# EAGLE board alu3 2 (EAGLE 7.6.0)
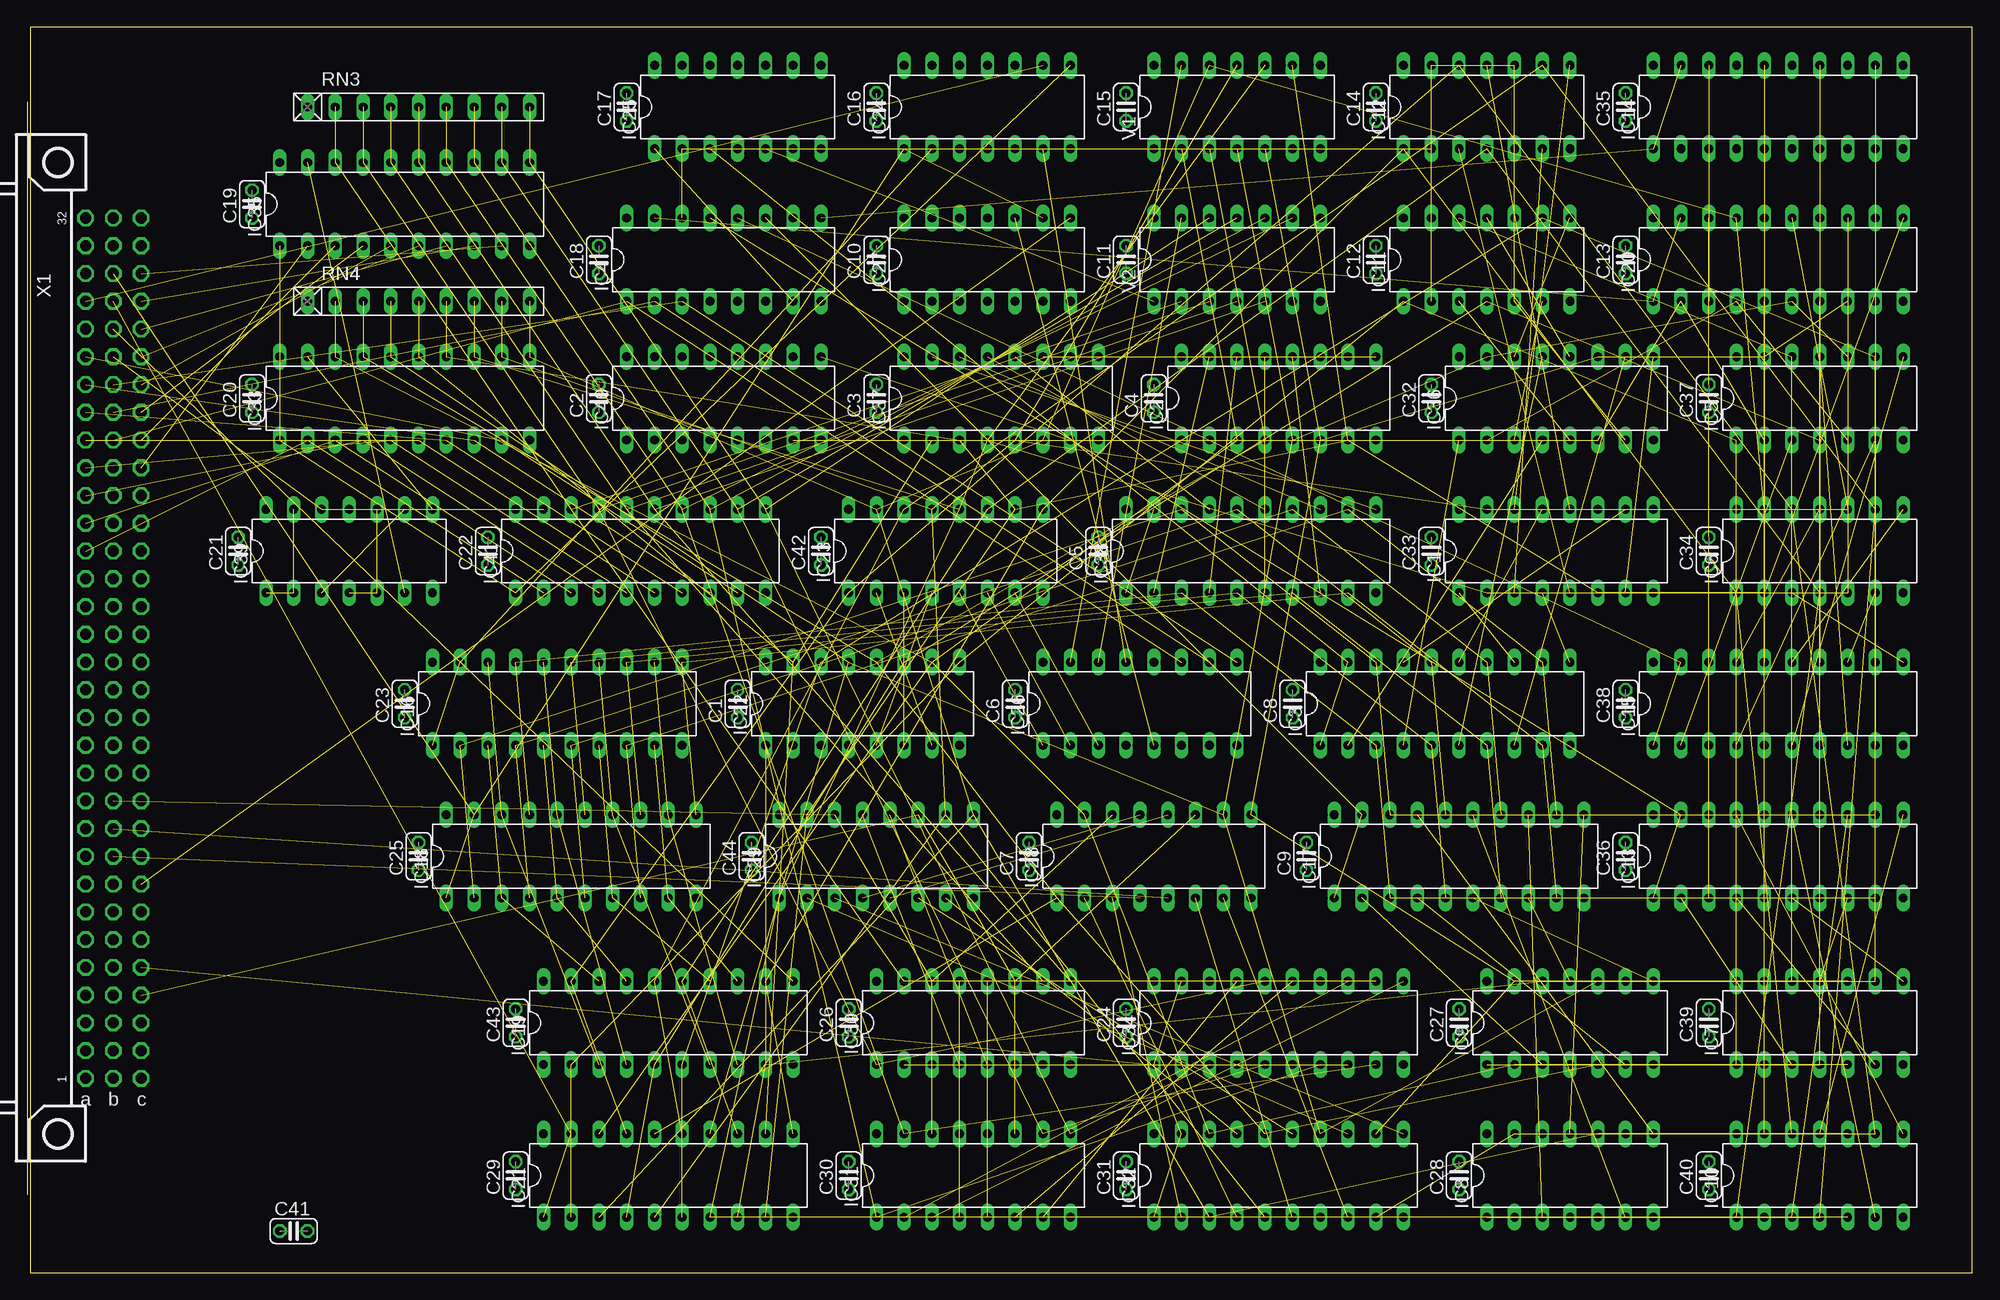
[diagram p0: board, top side]
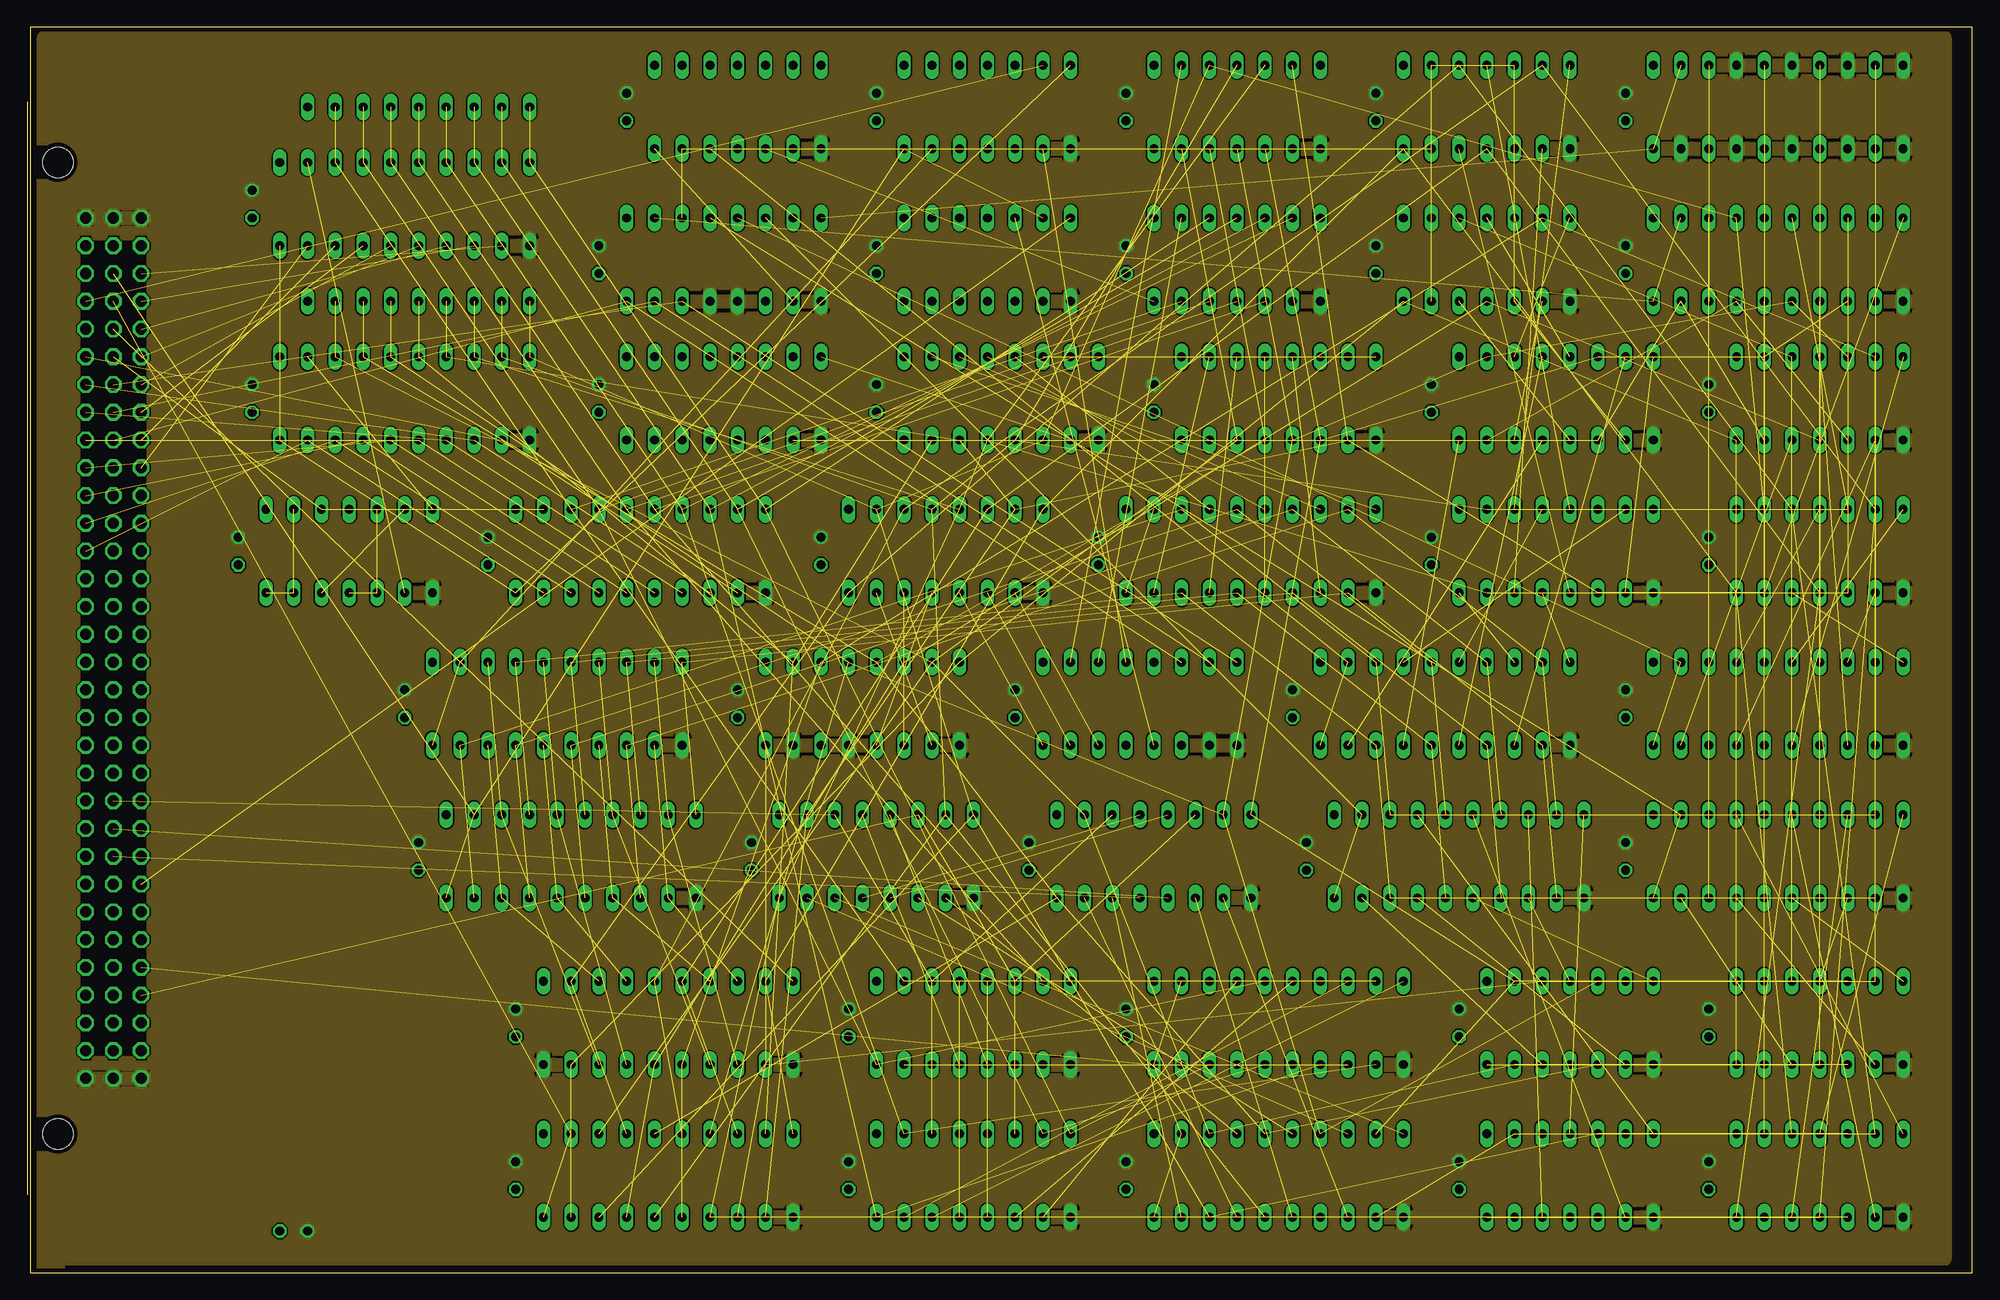
[diagram p1: board, inner layer Route2]
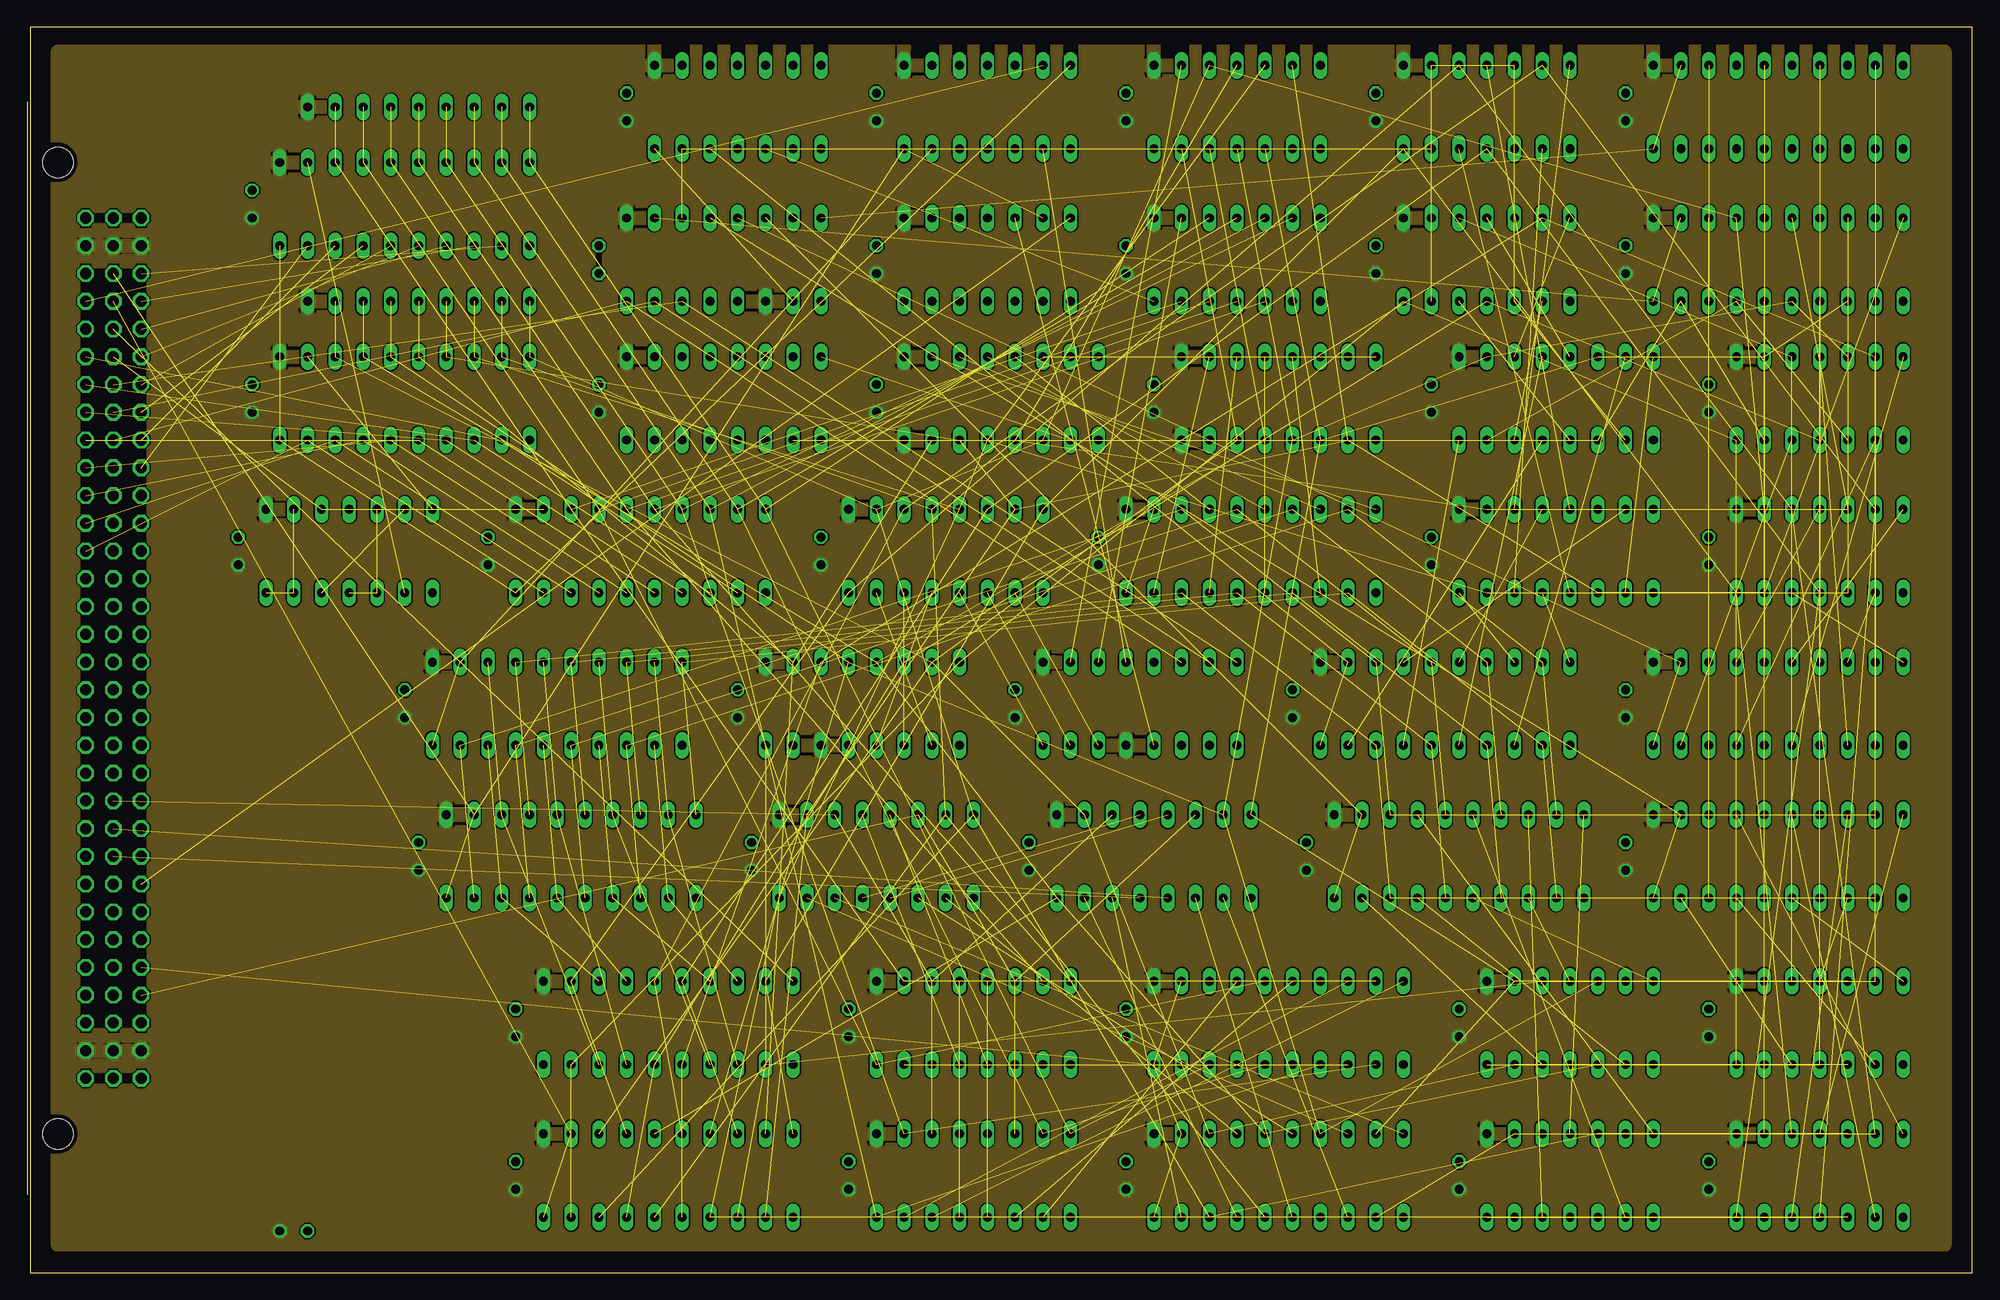
[diagram p2: board, inner layer Route15]

Size 177.78 x 113.97 mm. Coordinates in mm from the lower left corner, seen from the top.
Outline: 0,0 177.78,0 177.78,113.97 0,113.97 0,0
Copper layers (1*2*15*16): Top 0.035559375mm / dielectric 0.17018125mm / Route2 0.01778125mm / dielectric 47mil / Route15 0.01778125mm / dielectric 0.17018125mm / Bottom 0.035559375mm
Design rules "OSHPark-4layer": minimum track width 5mil, minimum drill 10mil, track to track 5mil, track to pad 5mil, pad to pad 5mil, via to via 5mil, smd to smd 5mil, copper to edge 15mil, drill to drill 6mil, minimum pad ring 4mil, minimum via ring 4mil, stop-mask expansion 2.5mil, vias tented up to drill 0mil, thermal gap 10mil

## Footprints (pad centres in the part's own frame; a part is rotated, then mirrored left to right if it is on the bottom)
C025-024X044 = drill 0.813 octagon: 1 -1.27,0; 2 1.27,0
DIL16 = drill 0.813 long: 1 -8.89,-3.81; 2 -6.35,-3.81; 3 -3.81,-3.81; 4 -1.27,-3.81; 5 1.27,-3.81; 6 3.81,-3.81; 7 6.35,-3.81; 8 8.89,-3.81; 9 8.89,3.81; 10 6.35,3.81; 11 3.81,3.81; 12 1.27,3.81; 13 -1.27,3.81; 14 -3.81,3.81; 15 -6.35,3.81; 16 -8.89,3.81
DIL20 = drill 0.813 long: 1 -11.43,-3.81; 2 -8.89,-3.81; 3 -6.35,-3.81; 4 -3.81,-3.81; 5 -1.27,-3.81; 6 1.27,-3.81; 7 3.81,-3.81; 8 6.35,-3.81; 9 8.89,-3.81; 10 11.43,-3.81; 11 11.43,3.81; 12 8.89,3.81; 13 6.35,3.81; 14 3.81,3.81; 15 1.27,3.81; 16 -1.27,3.81; 17 -3.81,3.81; 18 -6.35,3.81; 19 -8.89,3.81; 20 -11.43,3.81
DIL14 = drill 0.813 long: 1 -7.62,-3.81; 2 -5.08,-3.81; 3 -2.54,-3.81; 4 0,-3.81; 5 2.54,-3.81; 6 5.08,-3.81; 7 7.62,-3.81; 8 7.62,3.81; 9 5.08,3.81; 10 2.54,3.81; 11 0,3.81; 12 -2.54,3.81; 13 -5.08,3.81; 14 -7.62,3.81
RN-9 = drill 0.813 long: 1 -10.16,0; 2 -7.62,0; 3 -5.08,0; 4 -2.54,0; 5 0,0; 6 2.54,0; 7 5.08,0; 8 7.62,0; 9 10.16,0
FABC96R = drill 1.016 octagon: A1 -2.54,39.37; A2 -2.54,36.83; A3 -2.54,34.29; A4 -2.54,31.75; A5 -2.54,29.21; A6 -2.54,26.67; A7 -2.54,24.13; A8 -2.54,21.59; A9 -2.54,19.05; A10 -2.54,16.51; A11 -2.54,13.97; A12 -2.54,11.43; A13 -2.54,8.89; A14 -2.54,6.35; A15 -2.54,3.81; A16 -2.54,1.27; A17 -2.54,-1.27; A18 -2.54,-3.81; A19 -2.54,-6.35; A20 -2.54,-8.89; A21 -2.54,-11.43; A22 -2.54,-13.97; A23 -2.54,-16.51; A24 -2.54,-19.05; A25 -2.54,-21.59; A26 -2.54,-24.13; A27 -2.54,-26.67; A28 -2.54,-29.21; A29 -2.54,-31.75; A30 -2.54,-34.29; A31 -2.54,-36.83; A32 -2.54,-39.37; B1 -5.08,39.37; B2 -5.08,36.83; B3 -5.08,34.29; B4 -5.08,31.75; B5 -5.08,29.21; B6 -5.08,26.67; B7 -5.08,24.13; B8 -5.08,21.59; B9 -5.08,19.05; B10 -5.08,16.51; B11 -5.08,13.97; B12 -5.08,11.43; B13 -5.08,8.89; B14 -5.08,6.35; B15 -5.08,3.81; B16 -5.08,1.27; B17 -5.08,-1.27; B18 -5.08,-3.81; B19 -5.08,-6.35; B20 -5.08,-8.89; B21 -5.08,-11.43; B22 -5.08,-13.97; B23 -5.08,-16.51; B24 -5.08,-19.05; B25 -5.08,-21.59; B26 -5.08,-24.13; B27 -5.08,-26.67; B28 -5.08,-29.21; B29 -5.08,-31.75; B30 -5.08,-34.29; B31 -5.08,-36.83; B32 -5.08,-39.37; C1 -7.62,39.37; C2 -7.62,36.83; C3 -7.62,34.29; C4 -7.62,31.75; C5 -7.62,29.21; C6 -7.62,26.67; C7 -7.62,24.13; C8 -7.62,21.59; C9 -7.62,19.05; C10 -7.62,16.51; C11 -7.62,13.97; C12 -7.62,11.43; C13 -7.62,8.89; C14 -7.62,6.35; C15 -7.62,3.81; C16 -7.62,1.27; C17 -7.62,-1.27; C18 -7.62,-3.81; C19 -7.62,-6.35; C20 -7.62,-8.89; C21 -7.62,-11.43; C22 -7.62,-13.97; C23 -7.62,-16.51; C24 -7.62,-19.05; C25 -7.62,-21.59; C26 -7.62,-24.13; C27 -7.62,-26.67; C28 -7.62,-29.21; C29 -7.62,-31.75; C30 -7.62,-34.29; C31 -7.62,-36.83; C32 -7.62,-39.37 | hole 2.794: 0,-44.456; 0,44.456

## Placement (x,y rotation side)
C1  [C025-024X044]  64.77,52.07 90 top
C2  [C025-024X044]  52.07,80.01 90 top
C3  [C025-024X044]  77.47,80.01 90 top
C4  [C025-024X044]  102.87,80.01 90 top
C5  [C025-024X044]  97.79,66.04 90 top
C6  [C025-024X044]  90.17,52.07 90 top
C7  [C025-024X044]  91.44,38.1 90 top
C8  [C025-024X044]  115.57,52.07 90 top
C9  [C025-024X044]  116.84,38.1 90 top
C10  [C025-024X044]  77.47,92.71 90 top
C11  [C025-024X044]  100.33,92.71 90 top
C12  [C025-024X044]  123.19,92.71 90 top
C13  [C025-024X044]  146.05,92.71 90 top
C14  [C025-024X044]  123.19,106.68 90 top
C15  [C025-024X044]  100.33,106.68 90 top
C16  [C025-024X044]  77.47,106.68 90 top
C17  [C025-024X044]  54.61,106.68 90 top
C18  [C025-024X044]  52.07,92.71 90 top
C19  [C025-024X044]  20.32,97.79 90 top
C20  [C025-024X044]  20.32,80.01 90 top
C21  [C025-024X044]  19.05,66.04 90 top
C22  [C025-024X044]  41.91,66.04 90 top
C23  [C025-024X044]  34.29,52.07 90 top
C24  [C025-024X044]  100.33,22.86 90 top
C25  [C025-024X044]  35.56,38.1 90 top
C26  [C025-024X044]  74.93,22.86 90 top
C27  [C025-024X044]  130.81,22.86 90 top
C28  [C025-024X044]  130.81,8.89 90 top
C29  [C025-024X044]  44.45,8.89 90 top
C30  [C025-024X044]  74.93,8.89 90 top
C31  [C025-024X044]  100.33,8.89 90 top
C32  [C025-024X044]  128.27,80.01 90 top
C33  [C025-024X044]  128.27,66.04 90 top
C34  [C025-024X044]  153.67,66.04 90 top
C35  [C025-024X044]  146.05,106.68 90 top
C36  [C025-024X044]  146.05,38.1 90 top
C37  [C025-024X044]  153.67,80.01 90 top
C38  [C025-024X044]  146.05,52.07 90 top
C39  [C025-024X044]  153.67,22.86 90 top
C40  [C025-024X044]  153.67,8.89 90 top
C41  [C025-024X044]  24.13,3.81 0 top
C42  [C025-024X044]  72.39,66.04 90 top
C43  [C025-024X044]  44.45,22.86 90 top
C44  [C025-024X044]  66.04,38.1 90 top
IC1  74LS283N  [DIL16]  139.7,66.04 0 top
IC2  74LS194N  [DIL16]  114.3,80.01 0 top
IC3  74LS244N  [DIL20]  129.54,52.07 0 top
IC4  74LS138N  [DIL16]  63.5,92.71 0 top
IC5  74LS32N  [DIL14]  163.83,80.01 0 top
IC6  74LS32N  [DIL14]  163.83,66.04 0 top
IC7  74LS08N  [DIL14]  163.83,22.86 0 top
IC8  74LS86N  [DIL14]  140.97,8.89 0 top
IC9  74LS86N  [DIL14]  140.97,22.86 0 top
IC10  74LS08N  [DIL14]  163.83,8.89 0 top
IC11  74LS86N  [DIL14]  133.35,92.71 0 top
IC12  74LS86N  [DIL14]  133.35,106.68 0 top
IC13  74LS244N  [DIL20]  160.02,38.1 0 top
IC14  74LS244N  [DIL20]  160.02,106.68 0 top
IC15  74LS244N  [DIL20]  160.02,52.07 0 top
IC16  74LS240N  [DIL20]  48.26,52.07 0 top
IC17  74LS244N  [DIL20]  130.81,38.1 0 top
IC18  74LS244N  [DIL20]  49.53,38.1 0 top
IC19  74LS374N  [DIL20]  58.42,22.86 0 top
IC20  74LS244N  [DIL20]  160.02,92.71 0 top
IC21  74LS244N  [DIL20]  58.42,8.89 0 top
IC22  74LS85N  [DIL16]  76.2,52.07 0 top
IC23  74LS85N  [DIL16]  83.82,66.04 0 top
IC24  74ALS04N  [DIL14]  87.63,106.68 0 top
IC25  74LS32N  [DIL14]  64.77,106.68 0 top
IC26  74LS251N  [DIL16]  101.6,52.07 0 top
IC27  74LS86N  [DIL14]  87.63,92.71 0 top
IC28  74LS192N  [DIL16]  102.87,38.1 0 top
IC29  74LS192N  [DIL16]  77.47,38.1 0 top
IC30  74LS192N  [DIL16]  86.36,22.86 0 top
IC31  74LS192N  [DIL16]  86.36,8.89 0 top
IC32  74LS244N  [DIL20]  114.3,8.89 0 top
IC33  74LS245N  [DIL20]  34.29,80.01 0 top
IC34  74LS244N  [DIL20]  114.3,22.86 0 top
IC35  74LS245N  [DIL20]  34.29,97.79 0 top
IC36  74LS283N  [DIL16]  139.7,80.01 0 top
IC37  74LS194N  [DIL16]  88.9,80.01 0 top
IC38  74LS244N  [DIL20]  111.76,66.04 0 top
IC39  74LS00N  [DIL14]  29.21,66.04 0 top
IC40  74LS153N  [DIL16]  63.5,80.01 0 top
IC41  74LS245N  [DIL20]  55.88,66.04 0 top
RN3  10k  [RN-9]  35.56,106.68 0 top
RN4  10k  [RN-9]  35.56,88.9 0 top
V1  744078N  [DIL14]  110.49,106.68 0 top
V2  744078N  [DIL14]  110.49,92.71 0 top
X1  FABC96R  [FABC96R]  2.54,57.15 180 top

## Library data of the parts
C1-C44 = rcl
IC1-IC41 = 74xx-us
RN3 RN4 = resistor-net; OC_FARNELL: unknown; OC_NEWARK: unknown
V1 V2 = 74ttl-din
X1 = con-vg

## Nets
-DIR: IC24.8 IC33.1 IC35.1 IC41.1
-SUB: IC11.2 IC11.5 IC11.10 IC11.13 IC12.2 IC12.5 IC12.10 IC12.13 IC24.4 IC36.7
AC-IN-INV: IC18.1 IC18.19 IC24.1 IC27.9 X1.B30
ACI-DATA0: IC16.18 IC18.18 IC19.3
ACI-DATA1: IC16.16 IC18.16 IC19.4
ACI-DATA2: IC16.14 IC18.14 IC19.7
ACI-DATA3: IC16.12 IC18.12 IC19.8
ACI-DATA4: IC16.9 IC18.9 IC19.13
ACI-DATA5: IC16.7 IC18.7 IC19.14
ACI-DATA6: IC16.5 IC18.5 IC19.17
ACI-DATA7: IC16.3 IC18.3 IC19.18
ACO-DATA0: IC5.1 IC7.1 IC9.1 IC11.1 IC19.2 IC21.2 IC22.9
ACO-DATA1: IC5.4 IC7.4 IC9.4 IC11.4 IC19.5 IC21.4 IC22.11
ACO-DATA2: IC5.9 IC7.9 IC9.9 IC11.9 IC19.6 IC21.6 IC22.14
ACO-DATA3: IC5.12 IC7.12 IC9.12 IC11.12 IC19.9 IC21.8 IC22.1
ACO-DATA4: IC6.1 IC8.12 IC10.12 IC12.1 IC19.12 IC21.11 IC23.9
ACO-DATA5: IC6.4 IC8.1 IC10.1 IC12.4 IC19.15 IC21.13 IC23.11
ACO-DATA6: IC6.9 IC8.4 IC10.4 IC12.9 IC19.16 IC21.15 IC23.14
ACO-DATA7: IC6.12 IC8.9 IC10.9 IC12.12 IC19.19 IC21.17 IC23.1
ADD: IC4.7 IC25.1
ADDR0: X1.A4
ADDR1: X1.A5
ADDR2: X1.A6
ADDR3: X1.A7
ADDR4: X1.A8
ADDR5: X1.A9
ADDR6: X1.A10
ADDR7: X1.A11
ADDR8: X1.A12
ADDR9: X1.A13
ADDR10: X1.A14
ADDR11: X1.A15
ADDR12: X1.A16
ADDR13: X1.A17
ADDR14: X1.A18
ADDR15: X1.A19
ADDR-REG-CLK: X1.B4
ADDR-REG-OUT: X1.B8
ALU0: IC4.1 IC26.11 X1.B24
ALU1: IC4.2 IC26.10 X1.B25
ALU2: IC4.3 IC26.9 X1.B26
ALU-FUNC: IC39.4 IC39.5 IC39.10 IC39.12 X1.B27
AND: IC4.13 IC13.1 IC13.19
BDATA0: IC2.3 IC5.2 IC7.2 IC9.2 IC20.2 IC21.18 IC22.10 IC28.15 IC32.18 IC33.18 IC36.6 RN4.2 V1.2
BDATA1: IC2.4 IC5.5 IC7.5 IC9.5 IC20.4 IC21.16 IC22.12 IC28.1 IC32.16 IC33.17 IC36.2 RN4.3 V1.3
BDATA2: IC2.5 IC5.10 IC7.10 IC9.10 IC20.6 IC21.14 IC22.13 IC28.10 IC32.14 IC33.16 IC36.15 RN4.4 V1.4
BDATA3: IC2.6 IC5.13 IC7.13 IC9.13 IC20.8 IC21.12 IC22.15 IC28.9 IC32.12 IC33.15 IC36.11 IC37.2 RN4.5 V1.5
BDATA4: IC1.6 IC2.7 IC6.2 IC8.13 IC10.13 IC20.11 IC21.9 IC23.10 IC29.15 IC32.9 IC33.14 IC37.3 RN4.6 V1.9
BDATA5: IC1.2 IC6.5 IC8.2 IC10.2 IC20.13 IC21.7 IC23.12 IC29.1 IC32.7 IC33.13 IC37.4 RN4.7 V1.10
BDATA6: IC1.15 IC6.10 IC8.5 IC10.5 IC20.15 IC21.5 IC23.13 IC29.10 IC32.5 IC33.12 IC37.5 RN4.8 V1.11
BDATA7: IC1.11 IC6.13 IC8.10 IC10.10 IC20.17 IC21.3 IC23.15 IC29.9 IC32.3 IC33.11 IC37.6 RN4.9 V1.12
BDATA8: IC30.15 IC34.18 IC35.18 IC41.18 RN3.2 V2.2
BDATA9: IC30.1 IC34.16 IC35.17 IC41.17 RN3.3 V2.3
BDATA10: IC30.10 IC34.14 IC35.16 IC41.16 RN3.4 V2.4
BDATA11: IC30.9 IC34.12 IC35.15 IC41.15 RN3.5 V2.5
BDATA12: IC31.15 IC34.9 IC35.14 IC41.14 RN3.6 V2.9
BDATA13: IC31.1 IC34.7 IC35.13 IC41.13 RN3.7 V2.10
BDATA14: IC31.10 IC34.5 IC35.12 IC41.12 RN3.8 V2.11
BDATA15: IC31.9 IC34.3 IC35.11 IC41.11 RN3.9 V2.12
BR-COND: IC27.8 X1.C8
BR-REG-LD: X1.C6
BR-REG-OUT: X1.C7
BRD-ADDR-REG0: X1.B5
BRD-ADDR-REG1: X1.B6
BRD-IN-ID0: X1.B18
BRD-IN-ID1: X1.B19
BRD-OUT-ID0: X1.B14
BRD-OUT-ID1: X1.B15
DATA: IC4.15 IC20.1 IC20.19
DATA0: IC33.2 IC41.2 X1.A20
DATA1: IC33.3 IC41.3 X1.A21
DATA2: IC33.4 IC41.4 X1.A22
DATA3: IC33.5 IC41.5 X1.A23
DATA4: IC33.6 IC41.6 X1.A24
DATA5: IC33.7 IC41.7 X1.A25
DATA6: IC33.8 IC41.8 X1.A26
DATA7: IC33.9 IC41.9 X1.A27
DATA8: IC35.2 X1.C23
DATA9: IC35.3 X1.C24
DATA10: IC35.4 X1.C25
DATA11: IC35.5 X1.C26
DATA12: IC35.6 X1.C27
DATA13: IC35.7 X1.C28
DATA14: IC35.8 X1.C29
DATA15: IC35.9 X1.C30
DATA-REG-IN-ID0: X1.B16
DATA-REG-IN-ID1: X1.B17
DATA-REG-OUT-ID0: X1.B12
DATA-REG-OUT-ID1: X1.B13
DATA-REG-RD-HI: X1.B22
DATA-REG-RD-LO: X1.B20
DATA-REG-WR-HI: X1.B23
DATA-REG-WR-LO: X1.B21
DIR: IC24.9 X1.A29
GND: C1.2 C2.2 C3.2 C4.2 C5.2 C6.2 C7.2 C8.2 C9.2 C10.2 C11.2 C12.2 C13.2 C14.2 C15.2 C16.2 C17.2 C18.2 C19.2 C20.2 C21.2 C22.2 C23.2 C24.2 C25.2 C26.2 C27.2 C28.2 C29.2 C30.2 C31.2 C32.2 C33.2 C34.2 C35.2 C36.2 C37.2 C38.2 C39.2 C40.2 C41.2 C42.2 C43.2 C44.2 IC1.8 IC2.8 IC3.10 IC4.4 IC4.5 IC4.8 IC5.7 IC6.7 IC7.7 IC8.7 IC9.7 IC10.7 IC11.7 IC12.7 IC13.10 IC14.2 IC14.4 IC14.6 IC14.8 IC14.10 IC14.11 IC14.13 IC14.15 IC14.17 IC15.10 IC16.10 IC17.10 IC18.10 IC19.1 IC19.10 IC20.10 IC21.10 IC22.2 IC22.4 IC22.8 IC23.8 IC24.7 IC25.7 IC26.7 IC26.8 IC27.7 IC28.8 IC29.8 IC30.8 IC31.8 IC32.10 IC33.10 IC34.10 IC35.10 IC36.8 IC37.8 IC38.10 IC39.7 IC40.8 IC41.10 V1.7 V2.7 X1.A1 X1.A32 X1.B1 X1.B32 X1.C1 X1.C32
H/L-SWAP: X1.A30
HLSWAP: IC39.1 IC39.2 IC39.13
I/D-REG-DN: IC28.4 X1.B9
I/D-REG-LD: IC28.11 IC29.11 IC30.11 IC31.11 X1.C4
I/D-REG-OUT: IC32.1 IC32.19 IC34.1 IC34.19 X1.C5
I/D-REG-UP: IC28.5 X1.B10
INV-IN0: IC3.18 IC13.18 IC14.18 IC15.18 IC16.2 IC17.18 IC18.2 IC20.18 IC38.18
INV-IN1: IC3.16 IC13.16 IC14.16 IC15.16 IC16.4 IC17.16 IC18.4 IC20.16 IC38.16
INV-IN2: IC3.14 IC13.14 IC14.14 IC15.14 IC16.6 IC17.14 IC18.6 IC20.14 IC38.14
INV-IN3: IC3.12 IC13.12 IC14.12 IC15.12 IC16.8 IC17.12 IC18.8 IC20.12 IC38.12
INV-IN4: IC3.9 IC13.9 IC14.9 IC15.9 IC16.11 IC17.9 IC18.11 IC20.9 IC38.9
INV-IN5: IC3.7 IC13.7 IC14.7 IC15.7 IC16.13 IC17.7 IC18.13 IC20.7 IC38.7
INV-IN6: IC3.5 IC13.5 IC14.5 IC15.5 IC16.15 IC17.5 IC18.15 IC20.5 IC38.5
INV-IN7: IC3.3 IC13.3 IC14.3 IC15.3 IC16.17 IC17.3 IC18.17 IC20.3 IC38.3
LD-AC: IC19.11 X1.B28
N$1: IC5.3 IC15.2
N$2: IC5.6 IC15.4
N$3: IC5.8 IC15.6
N$4: IC5.11 IC15.8
N$5: IC6.3 IC15.11
N$6: IC6.6 IC15.13
N$7: IC6.8 IC15.15
N$8: IC6.11 IC15.17
N$9: IC7.3 IC13.2
N$10: IC7.6 IC13.4
N$11: IC7.8 IC13.6
N$12: IC7.11 IC13.8
N$13: IC10.11 IC13.11
N$14: IC10.3 IC13.13
N$15: IC10.6 IC13.15
N$16: IC10.8 IC13.17
N$17: IC9.3 IC17.2
N$18: IC9.6 IC17.4
N$19: IC9.8 IC17.6
N$20: IC9.11 IC17.8
N$21: IC8.11 IC17.11
N$22: IC8.3 IC17.13
N$23: IC8.6 IC17.15
N$24: IC8.8 IC17.17
N$25: IC11.6 IC36.3
N$26: IC11.8 IC36.14
N$27: IC11.11 IC36.12
N$28: IC11.3 IC36.5
N$29: IC1.5 IC12.3
N$30: IC1.3 IC12.6
N$31: IC1.14 IC12.8
N$32: IC1.12 IC12.11
N$33: IC3.2 IC36.4
N$34: IC3.4 IC36.1
N$35: IC3.6 IC36.13
N$36: IC3.8 IC36.10
N$37: IC1.4 IC3.11
N$38: IC1.1 IC3.13
N$39: IC1.13 IC3.15
N$40: IC1.10 IC3.17
N$41: IC1.7 IC36.9
N$42: IC16.1 IC16.19 IC24.2
N$43: IC22.5 IC23.4
N$44: IC3.1 IC3.19 IC25.3
N$45: IC22.6 IC23.3
N$46: IC22.7 IC23.2
N$47: IC23.7 IC26.3
N$48: IC23.6 IC26.2
N$49: IC23.5 IC26.1
N$50: IC25.4 V1.1
N$51: IC26.15 V1.13
N$52: IC26.14 V2.13
N$53: IC25.5 V2.1
N$54: IC24.5 IC25.6
N$55: IC24.6 IC26.13
N$56: IC26.5 IC27.10
N$57: IC2.15 IC38.2
N$58: IC28.13 IC29.4
N$59: IC28.12 IC29.5
N$60: IC29.13 IC30.4
N$61: IC29.12 IC30.5
N$62: IC30.13 IC31.4
N$63: IC30.12 IC31.5
N$64: IC35.19 IC39.6
N$65: IC33.19 IC39.8
N$66: IC2.14 IC38.4
N$67: IC39.11 IC41.19
N$68: IC39.3 IC39.9
N$69: IC2.13 IC38.6
N$70: IC2.12 IC38.8
N$71: IC37.15 IC38.11
N$72: IC37.14 IC38.13
N$73: IC37.13 IC38.15
N$74: IC37.12 IC38.17
N$75: IC2.2 IC40.7
N$76: IC37.7 IC40.9
N$77: IC2.9 IC37.9
N$78: IC2.10 IC37.10
N$80: IC2.11 IC37.11
OR: IC4.12 IC15.1 IC15.19
OVERFLOW: IC26.12
R1D0: IC28.7 IC32.8
R1D1: IC28.6 IC32.6
R1D2: IC28.2 IC32.4
R1D3: IC28.3 IC32.2
R1D4: IC29.7 IC32.17
R1D5: IC29.6 IC32.15
R1D6: IC29.2 IC32.13
R1D7: IC29.3 IC32.11
R1D8: IC30.7 IC34.8
R1D9: IC30.6 IC34.6
R1D10: IC30.2 IC34.4
R1D11: IC30.3 IC34.2
R1D12: IC31.7 IC34.17
R1D13A: IC31.6 IC34.15
R1D14: IC31.2 IC34.13
R1D15: IC31.3 IC34.11
RD-AC: IC21.1 IC21.19 X1.B29
RESET: IC28.14 IC29.14 IC30.14 IC31.14 X1.B11
SHIFT: IC38.1 IC38.19
SP/PC-ADDR-OUT: X1.C19
SP/PC-DATA-OUT-HI: X1.C18
SP/PC-DATA-OUT-LO: X1.C17
SP/PC-DN: X1.C21
SP/PC-LD: X1.C20
SP/PC-SEL: X1.C16
SP/PC-UP: X1.C22
SUB: IC4.14 IC24.3 IC25.2
VCC: C1.1 C2.1 C3.1 C4.1 C5.1 C6.1 C7.1 C8.1 C9.1 C10.1 C11.1 C12.1 C13.1 C14.1 C15.1 C16.1 C17.1 C19.1 C20.1 C21.1 C22.1 C23.1 C24.1 C25.1 C26.1 C27.1 C28.1 C29.1 C30.1 C31.1 C32.1 C33.1 C34.1 C35.1 C36.1 C37.1 C38.1 C39.1 C40.1 C41.1 C42.1 C43.1 C44.1 IC1.16 IC2.1 IC2.16 IC3.20 IC4.6 IC4.16 IC5.14 IC6.14 IC7.14 IC8.14 IC9.14 IC10.14 IC11.14 IC12.14 IC13.20 IC14.20 IC15.20 IC16.20 IC17.20 IC18.20 IC19.20 IC20.20 IC21.20 IC22.3 IC22.16 IC23.16 IC24.14 IC25.14 IC26.4 IC26.16 IC27.14 IC28.16 IC29.16 IC30.16 IC31.16 IC32.20 IC33.20 IC34.20 IC35.20 IC36.16 IC37.1 IC37.16 IC38.20 IC39.14 IC40.16 IC41.20 RN3.1 RN4.1 V1.14 V2.14 X1.A2 X1.A31 X1.B2 X1.B31 X1.C2 X1.C31
XOR: IC4.11 IC17.1 IC17.19
ZERO: IC4.9 IC14.1 IC14.19

## Tracks (layer width: path | path; a pad name or v marks a point on that pad's centre or on a via)
-DIR  (3 unrouted)
-SUB  (9 unrouted)
AC-IN-INV  (4 unrouted)
ACI-DATA0  (2 unrouted)
ACI-DATA1  (2 unrouted)
ACI-DATA2  (2 unrouted)
ACI-DATA3  (2 unrouted)
ACI-DATA4  (2 unrouted)
ACI-DATA5  (2 unrouted)
ACI-DATA6  (2 unrouted)
ACI-DATA7  (2 unrouted)
ACO-DATA0  (6 unrouted)
ACO-DATA1  (6 unrouted)
ACO-DATA2  (6 unrouted)
ACO-DATA3  (6 unrouted)
ACO-DATA4  (6 unrouted)
ACO-DATA5  (6 unrouted)
ACO-DATA6  (6 unrouted)
ACO-DATA7  (6 unrouted)
ADD  (1 unrouted)
ALU0  (2 unrouted)
ALU1  (2 unrouted)
ALU2  (2 unrouted)
ALU-FUNC  (4 unrouted)
AND  (2 unrouted)
BDATA0  (12 unrouted)
BDATA1  (12 unrouted)
BDATA2  (12 unrouted)
BDATA3  (13 unrouted)
BDATA4  (13 unrouted)
BDATA5  (12 unrouted)
BDATA6  (12 unrouted)
BDATA7  (12 unrouted)
BDATA8  (5 unrouted)
BDATA9  (5 unrouted)
BDATA10  (5 unrouted)
BDATA11  (5 unrouted)
BDATA12  (5 unrouted)
BDATA13  (5 unrouted)
BDATA14  (5 unrouted)
BDATA15  (5 unrouted)
BR-COND  (1 unrouted)
DATA  (2 unrouted)
DATA0  (2 unrouted)
DATA1  (2 unrouted)
DATA2  (2 unrouted)
DATA3  (2 unrouted)
DATA4  (2 unrouted)
DATA5  (2 unrouted)
DATA6  (2 unrouted)
DATA7  (2 unrouted)
DATA8  (1 unrouted)
DATA9  (1 unrouted)
DATA10  (1 unrouted)
DATA11  (1 unrouted)
DATA12  (1 unrouted)
DATA13  (1 unrouted)
DATA14  (1 unrouted)
DATA15  (1 unrouted)
DIR  (1 unrouted)
GND
  pour Route2: 1.27,113.03 175.26,113.03 175.26,1.27 2.54,1.27 2.54,0 1.27,0
HLSWAP  (2 unrouted)
I/D-REG-DN  (1 unrouted)
I/D-REG-LD  (4 unrouted)
I/D-REG-OUT  (4 unrouted)
I/D-REG-UP  (1 unrouted)
INV-IN0  (8 unrouted)
INV-IN1  (8 unrouted)
INV-IN2  (8 unrouted)
INV-IN3  (8 unrouted)
INV-IN4  (8 unrouted)
INV-IN5  (8 unrouted)
INV-IN6  (8 unrouted)
INV-IN7  (8 unrouted)
LD-AC  (1 unrouted)
N$1  (1 unrouted)
N$2  (1 unrouted)
N$3  (1 unrouted)
N$4  (1 unrouted)
N$5  (1 unrouted)
N$6  (1 unrouted)
N$7  (1 unrouted)
N$8  (1 unrouted)
N$9  (1 unrouted)
N$10  (1 unrouted)
N$11  (1 unrouted)
N$12  (1 unrouted)
N$13  (1 unrouted)
N$14  (1 unrouted)
N$15  (1 unrouted)
N$16  (1 unrouted)
N$17  (1 unrouted)
N$18  (1 unrouted)
N$19  (1 unrouted)
N$20  (1 unrouted)
N$21  (1 unrouted)
N$22  (1 unrouted)
N$23  (1 unrouted)
N$24  (1 unrouted)
N$25  (1 unrouted)
N$26  (1 unrouted)
N$27  (1 unrouted)
N$28  (1 unrouted)
N$29  (1 unrouted)
N$30  (1 unrouted)
N$31  (1 unrouted)
N$32  (1 unrouted)
N$33  (1 unrouted)
N$34  (1 unrouted)
N$35  (1 unrouted)
N$36  (1 unrouted)
N$37  (1 unrouted)
N$38  (1 unrouted)
N$39  (1 unrouted)
N$40  (1 unrouted)
N$41  (1 unrouted)
N$42  (2 unrouted)
N$43  (1 unrouted)
N$44  (2 unrouted)
N$45  (1 unrouted)
N$46  (1 unrouted)
N$47  (1 unrouted)
N$48  (1 unrouted)
N$49  (1 unrouted)
N$50  (1 unrouted)
N$51  (1 unrouted)
N$52  (1 unrouted)
N$53  (1 unrouted)
N$54  (1 unrouted)
N$55  (1 unrouted)
N$56  (1 unrouted)
N$57  (1 unrouted)
N$58  (1 unrouted)
N$59  (1 unrouted)
N$60  (1 unrouted)
N$61  (1 unrouted)
N$62  (1 unrouted)
N$63  (1 unrouted)
N$64  (1 unrouted)
N$65  (1 unrouted)
N$66  (1 unrouted)
N$67  (1 unrouted)
N$68  (1 unrouted)
N$69  (1 unrouted)
N$70  (1 unrouted)
N$71  (1 unrouted)
N$72  (1 unrouted)
N$73  (1 unrouted)
N$74  (1 unrouted)
N$75  (1 unrouted)
N$76  (1 unrouted)
N$77  (1 unrouted)
N$78  (1 unrouted)
N$80  (1 unrouted)
OR  (2 unrouted)
R1D0  (1 unrouted)
R1D1  (1 unrouted)
R1D2  (1 unrouted)
R1D3  (1 unrouted)
R1D4  (1 unrouted)
R1D5  (1 unrouted)
R1D6  (1 unrouted)
R1D7  (1 unrouted)
R1D8  (1 unrouted)
R1D9  (1 unrouted)
R1D10  (1 unrouted)
R1D11  (1 unrouted)
R1D12  (1 unrouted)
R1D13A  (1 unrouted)
R1D14  (1 unrouted)
R1D15  (1 unrouted)
RD-AC  (2 unrouted)
RESET  (4 unrouted)
SHIFT  (1 unrouted)
SUB  (2 unrouted)
VCC
  pour Route15: 2.54,111.76 175.26,111.76 175.26,110.49 175.26,2.54 2.54,2.54
XOR  (2 unrouted)
ZERO  (2 unrouted)